# EAGLE board ENC_MPX_V0.1 (EAGLE 9.5.2)
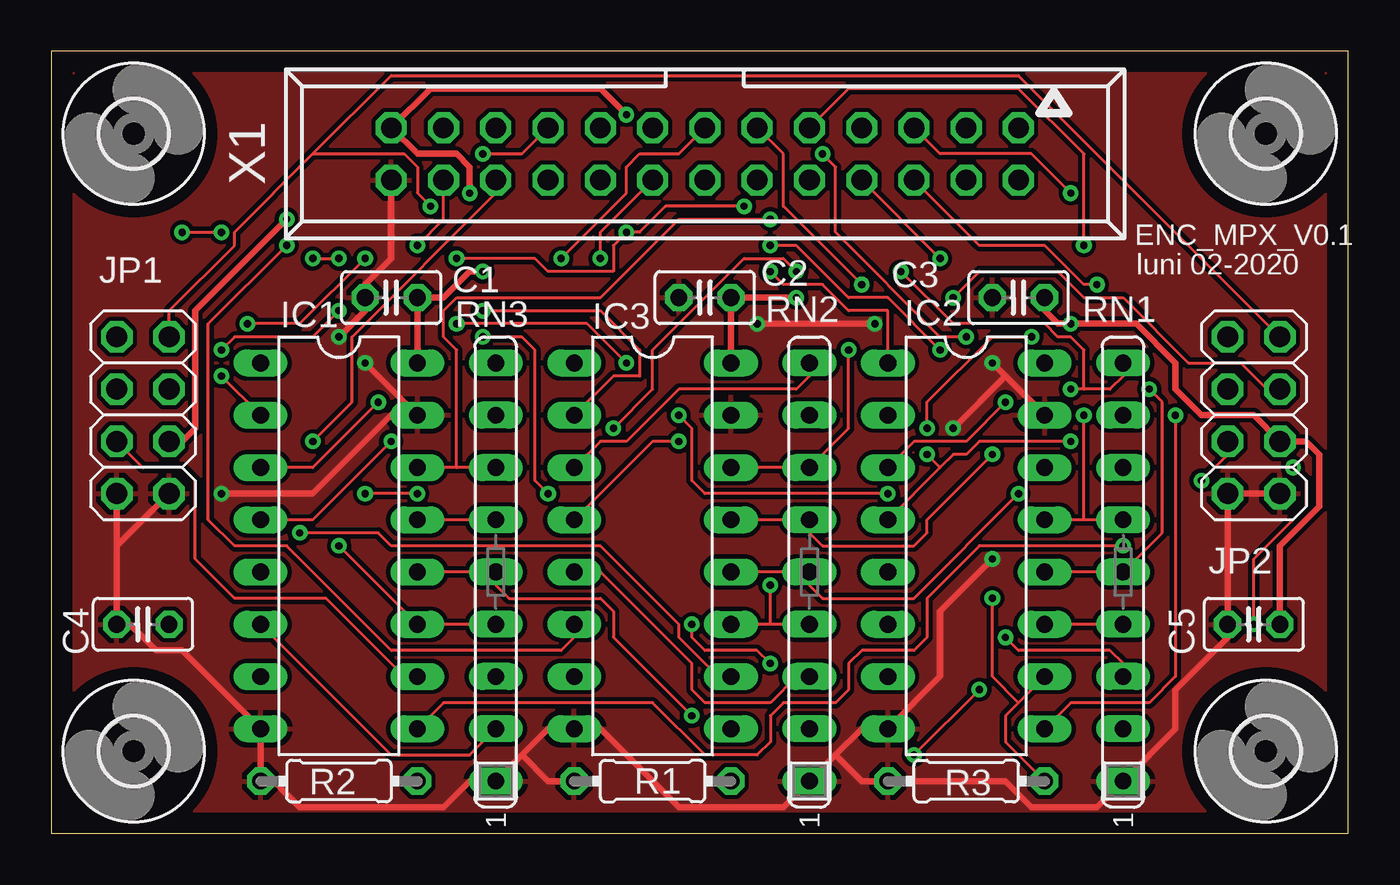
[diagram p0: board, top side]
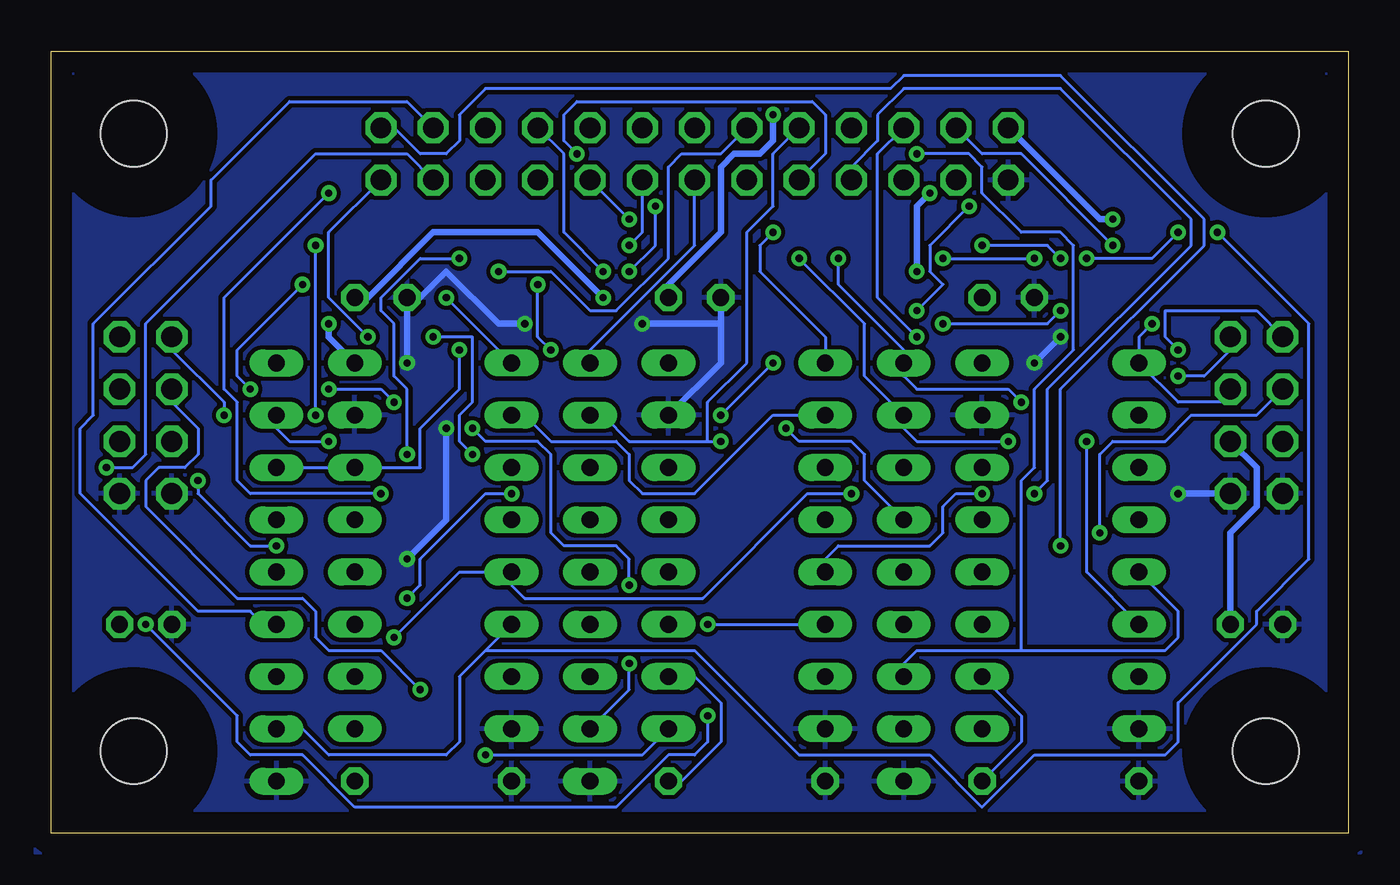
[diagram p1: board, bottom side, seen from below]

Size 63 x 38 mm. Coordinates in mm from the lower left corner, seen from the top.
Outline: 0,0 63,0 63,38 0,38 0,0
Copper layers (1*16): Top 0.035mm / dielectric 1.5mm / Bottom 0.035mm
Design rules "default *": minimum track width 6mil, minimum drill 0.35mm, track to track 8mil, track to pad 6mil, pad to pad 6mil, via to via 6mil, smd to smd 6mil, copper to edge 40mil, drill to drill 6mil, minimum pad ring 10mil, minimum via ring 8mil, stop-mask expansion 4mil, vias tented up to drill 0mil, thermal gap 10mil
Net classes: 1 supply: width 0.305 mm

## Footprints (pad centres in the part's own frame; a part is rotated, then mirrored left to right if it is on the bottom)
C025-025X050 = drill 0.813 octagon: 1 -1.27,0; 2 1.27,0
DIL16 = drill 0.813 long: 1 -8.89,-3.81; 2 -6.35,-3.81; 3 -3.81,-3.81; 4 -1.27,-3.81; 5 1.27,-3.81; 6 3.81,-3.81; 7 6.35,-3.81; 8 8.89,-3.81; 9 8.89,3.81; 10 6.35,3.81; 11 3.81,3.81; 12 1.27,3.81; 13 -1.27,3.81; 14 -3.81,3.81; 15 -6.35,3.81; 16 -8.89,3.81
2X04 = drill 1.016 octagon: 1 -3.81,-1.27; 2 -3.81,1.27; 3 -1.27,-1.27; 4 -1.27,1.27; 5 1.27,-1.27; 6 1.27,1.27; 7 3.81,-1.27; 8 3.81,1.27
0204/7 = drill 0.813 octagon: 1 -3.81,0; 2 3.81,0
SIL9 = drill 0.813 long: 1 -10.16,0; 2 -7.62,0; 3 -5.08,0; 4 -2.54,0; 5 0,0; 6 2.54,0; 7 5.08,0; 8 7.62,0; 9 10.16,0
3,2 = hole 3.2: 0,0
057-026-1 = drill 1 octagon: 1 -15.24,-1.27; 2 -15.24,1.27; 3 -12.7,-1.27; 4 -12.7,1.27; 5 -10.16,-1.27; 6 -10.16,1.27; 7 -7.62,-1.27; 8 -7.62,1.27; 9 -5.08,-1.27; 10 -5.08,1.27; 11 -2.54,-1.27; 12 -2.54,1.27; 13 0,-1.27; 14 0,1.27; 15 2.54,-1.27; 16 2.54,1.27; 17 5.08,-1.27; 18 5.08,1.27; 19 7.62,-1.27; 20 7.62,1.27; 21 10.16,-1.27; 22 10.16,1.27; 23 12.7,-1.27; 24 12.7,1.27; 25 15.24,-1.27; 26 15.24,1.27

## Placement (x,y rotation side)
C1  100n  [C025-025X050]  16.51,26.04 180 top
C2  100n  [C025-025X050]  31.75,26.04 180 top
C3  100n  [C025-025X050]  46.99,26.04 180 top
C4  100n  [C025-025X050]  4.45,10.16 180 top
C5  100n  [C025-025X050]  58.42,10.16 180 top
IC1  74HC165N  [DIL16]  13.97,13.97 270 top
IC2  74HC165N  [DIL16]  44.45,13.97 270 top
IC3  74HC165N  [DIL16]  29.21,13.97 270 top
JP1  [2X04]  4.45,20.32 270 top
JP2  [2X04]  58.42,20.32 270 top
R1  4k7  [0204/7]  29.21,2.54 0 top
R2  4k7  [0204/7]  13.97,2.54 180 top
R3  4k7  [0204/7]  44.45,2.54 0 top
RN1  4k7  [SIL9]  52.07,12.7 90 top
RN2  4k7  [SIL9]  36.83,12.7 90 top
RN3  4k7  [SIL9]  21.59,12.7 90 top
U$1  [3,2]  4,34 0 top
U$2  [3,2]  59,34 0 top
U$3  [3,2]  4,4 0 top
U$4  [3,2]  59,4 0 top
X1  057-026-1  [057-026-1]  31.75,33.02 180 top

## Library data of the parts
C1-C5 = rcl; SPICEPREFIX: C
IC1-IC3 = 74xx-eu
JP1 JP2 = pinhead
R1-R3 = rcl; SPICEPREFIX: R
RN1-RN3 = resistor-sil; OC_FARNELL: unknown; OC_NEWARK: unknown
U$1-U$4 = holes
X1 = con-panduit; OC_FARNELL: unknown; OC_NEWARK: unknown

## Nets
!LD: IC1.1 IC2.1 IC3.1 JP1.4 JP2.4
A1: IC1.11 RN3.4 X1.1
A2: IC1.12 RN3.5 X1.4
A3: IC1.13 RN3.6 X1.7
A4: IC1.14 RN3.7 X1.10
A5: IC1.3 RN3.9 X1.13
A6: IC1.4 RN3.8 X1.16
A7: IC1.5 RN3.3 X1.19
A8: IC1.6 RN3.2 X1.22
B1: IC3.11 RN2.4 X1.2
B2: IC3.12 RN2.5 X1.5
B3: IC3.13 RN2.6 X1.8
B4: IC3.14 RN2.7 X1.11
B5: IC3.3 RN2.9 X1.14
B6: IC3.4 RN2.8 X1.17
B7: IC3.5 RN2.3 X1.20
B8: IC3.6 RN2.2 X1.23
CLK: IC1.2 IC2.2 IC3.2 JP1.2 JP2.2
GND [supply]: C1.2 C2.2 C3.2 C4.2 C5.2 IC1.8 IC1.15 IC2.8 IC2.15 IC3.8 IC3.15 JP1.7 JP1.8 JP2.7 JP2.8 R1.1 R2.2 R3.1 RN1.1 RN2.1 RN3.1 X1.26
QA: IC1.9 JP2.5
QB: IC3.9 JP2.3
QS: IC2.9 JP2.1
S1: IC2.11 RN1.4 X1.3
S2: IC2.12 RN1.5 X1.6
S3: IC2.13 RN1.6 X1.9
S4: IC2.14 RN1.7 X1.12
S5: IC2.3 RN1.9 X1.15
S6: IC2.4 RN1.8 X1.18
S7: IC2.5 RN1.3 X1.21
S8: IC2.6 RN1.2 X1.24
SER_A: IC1.10 JP1.5 R2.1
SER_B: IC3.10 JP1.3 R1.2
SER_S: IC2.10 JP1.1 R3.2
VCC [supply]: C1.1 C2.1 C3.1 C4.1 C5.1 IC1.16 IC2.16 IC3.16 JP1.6 JP2.6 X1.25

## Tracks (layer width: path | path; a pad name or v marks a point on that pad's centre or on a via)
!LD  (via drill 0.35)
  Top 0.152: v33.66,30.48 29.84,30.48 28.57,29.21 v27.94,29.21 27.3,28.57 27.3,27.3 24.13,27.3 23.5,27.94 v19.68,27.94 | v34.92,27.3 35.56,26.67 37.47,26.67 38.73,25.4 40.64,25.4 IC2.1 | JP2.4 59.05,21.59 57.78,22.86 55.24,22.86 52.07,26.04 50.16,26.04 48.9,27.3 45.09,27.3 v43.81,26.04 | v9.53,24.77 12.06,24.77 v15.24,27.94
  Bottom 0.152: JP1.4 5.71,20.95 8.26,20.95 IC1.1 10.16,24.13 v9.53,24.77 | IC3.1 25.4,24.13 28.57,27.3 28.57,28.57 v27.94,29.21 | v33.66,30.48 33.66,28.57 v34.92,27.3 | IC2.1 v43.81,26.04 | v19.68,27.94 v15.24,27.94
A1  (via drill 0.35)
  Top 0.152: RN3.4 IC1.11 v13.97,13.97
  Bottom 0.152: X1.1 46.35,34.29 45.09,33.02 43.81,33.02 43.18,33.66 43.18,34.92 41.91,36.2 22.23,36.2 21.59,36.83 13.97,36.83 6.99,29.84 6.99,28.57 13.97,21.59 v13.97,13.97
A2  (via drill 0.35)
  Top 0.152: 20.95,12.7 IC1.12 | v60.33,17.78 60.96,17.14 60.96,15.88 58.42,13.34 v58.42,10.16 | v31.11,5.71 27.3,9.53 27.3,10.79 26.67,11.43 22.23,11.43 20.95,12.7 | 20.95,12.7 RN3.5
  Bottom 0.152: X1.4 45.72,33.02 50.16,33.02 58.42,24.77 58.42,18.41 59.05,17.78 v60.33,17.78 | v58.42,10.16 53.98,5.71 53.98,4.45 53.34,3.81 50.8,3.81 48.26,1.27 35.56,1.27 33.02,3.81 31.75,3.81 31.11,4.45 v31.11,5.71
A3  (via drill 0.35)
  Top 0.152: RN3.6 IC1.13 | v36.2,27.3 35.56,27.94 33.66,27.94 29.21,23.5 29.21,21.59 v27.3,19.68
  Bottom 0.152: X1.7 38.1,33.02 38.1,29.21 v36.2,27.3 | v27.3,19.68 26.67,19.05 24.13,19.05 23.5,18.41 23.5,17.14 RN3.6
A4  (via drill 0.35)
  Top 0.152: RN3.7 19.68,17.78 | 19.68,17.78 IC1.14 | v34.92,29.84 30.48,29.84 26.67,26.04 19.68,26.04 19.05,25.4 19.05,24.13 19.68,23.5 19.68,17.78
  Bottom 0.152: v34.92,29.84 X1.10
A5  (via drill 0.35)
  Top 0.152: IC1.3 12.7,17.78 v15.88,20.95 | X1.13 30.48,33.02 28.57,33.02 27.94,32.38 27.94,31.11 v24.77,27.94
  Bottom 0.152: v15.88,20.95 16.51,21.59 20.95,21.59 21.59,22.23 | v24.77,27.94 24.77,26.67 20.95,22.86 21.59,22.23 | 21.59,22.23 RN3.9
A6  (via drill 0.35)
  Top 0.152: IC1.4 12.7,15.24 v16.51,19.05 | X1.16 26.67,29.21 v26.67,27.94
  Bottom 0.152: v16.51,19.05 20.95,19.05 21.59,19.68 | v26.67,27.94 23.5,24.77 23.5,22.23 22.23,20.95 22.23,20.32 21.59,19.68 | 21.59,19.68 RN3.8
A7  (via drill 0.35)
  Top 0.152: X1.19 22.86,33.02 v20.95,33.02
  Bottom 0.152: IC1.5 8.26,10.79 8.26,9.53 8.89,8.89 15.88,8.89 | 15.88,8.89 20.95,8.89 21.59,8.26 RN3.3 | v20.95,33.02 18.41,33.02 17.78,32.38 17.78,31.11 15.88,29.21 13.97,29.21 13.34,28.57 13.34,23.5 15.24,21.59 15.24,17.78 15.88,17.14 15.88,8.89
A8  (via drill 0.35)
  Top 0.152: RN3.2 20.32,3.81 16.51,3.81 IC1.6 | X1.22 21.59,31.11 14.61,24.13 14.61,20.95 v12.7,19.05
  Bottom 0.152: v12.7,19.05 12.7,12.7 IC1.6
B1  (via drill 0.35)
  Top 0.152: RN2.4 34.92,10.16 | 34.92,10.16 IC3.11 | v47.62,24.13 45.72,24.13 42.55,20.95 v42.55,19.68 | 34.92,10.16 v34.92,12.06
  Bottom 0.152: X1.2 49.53,29.21 49.53,26.04 v47.62,24.13 | v42.55,19.68 41.91,19.05 39.37,19.05 38.73,18.41 38.73,14.61 38.1,13.97 35.56,13.97 34.92,13.34 v34.92,12.06
B2  (via drill 0.35)
  Top 0.152: 36.2,12.7 IC3.12 | X1.5 43.18,33.02 47.62,33.02 v49.53,31.11 | v46.99,16.51 41.91,11.43 37.47,11.43 36.2,12.7 | 36.2,12.7 RN2.5
  Bottom 0.152: v49.53,31.11 54.61,26.04 54.61,21.59 53.98,20.95 53.98,17.14 53.34,16.51 v46.99,16.51
B3  (via drill 0.35)
  Top 0.152: 36.2,15.24 IC3.13 | v43.18,27.94 X1.8 | v45.72,18.41 42.55,15.24 42.55,14.61 41.91,13.97 37.47,13.97 36.2,15.24 | 36.2,15.24 RN2.6
  Bottom 0.152: v43.18,27.94 45.09,27.94 46.99,26.04 46.99,25.4 46.35,24.77 46.35,22.23 45.72,21.59 v45.72,18.41
B4  (via drill 0.35)
  Top 0.152: IC3.14 RN2.7 38.73,19.68 v38.73,23.5 | X1.11 35.56,33.02 35.56,30.48 v39.37,26.67
  Bottom 0.152: v39.37,26.67 39.37,24.13 v38.73,23.5
B5
  Top 0.152: IC3.3 26.67,19.05 27.94,19.05 30.48,21.59 36.2,21.59 36.83,22.23 RN2.9
  Bottom 0.152: X1.14 31.75,28.57 36.83,23.5 RN2.9
B6  (via drill 0.35)
  Top 0.152: IC3.4 29.21,19.05 v30.48,19.05
  Bottom 0.152: 31.11,19.05 34.92,19.05 36.2,20.32 RN2.8 | 31.11,19.05 v30.48,19.05 | X1.17 27.94,33.02 27.94,30.48 29.21,29.21 29.21,22.86 31.11,20.95 31.11,19.05
B7  (via drill 0.35)
  Top 0.152: IC3.5 26.67,12.7 31.11,8.26 31.11,6.99 31.75,6.35 34.92,6.35 36.2,7.62 RN2.3 | v17.78,16.51 v15.24,16.51
  Bottom 0.152: X1.20 24.13,32.38 22.86,33.66 22.86,34.92 21.59,36.2 13.97,36.2 7.62,29.84 7.62,28.57 14.61,21.59 14.61,17.14 v15.24,16.51 | v17.78,16.51 19.05,16.51 19.68,15.88 19.68,14.61 20.32,13.97 24.77,13.97 25.4,13.34 IC3.5
B8  (via drill 0.35)
  Top 0.152: v31.11,10.16 31.11,9.53 31.75,8.89 34.29,8.89 v34.92,8.26 | v11.43,28.57 7.62,24.77 7.62,15.24 8.89,13.97 11.43,13.97 16.51,8.89 24.77,8.89 25.4,9.53 IC3.6
  Bottom 0.152: v31.11,10.16 IC3.6 | v34.92,8.26 34.92,6.99 RN2.2 | X1.23 17.78,33.02 15.88,33.02 v11.43,28.57
CLK  (via drill 0.35)
  Top 0.152: v8.26,22.23 IC1.2 | JP2.2 46.99,36.83 16.51,36.83 12.7,33.02 | 12.7,33.02 8.89,29.21 8.89,28.57 5.71,25.4 JP1.2 | IC3.2 27.3,22.23 28.57,22.23 28.57,23.5 26.67,25.4 v20.95,25.4 | v18.41,30.48 17.78,31.11 17.78,32.38 17.14,33.02 12.7,33.02
  Bottom 0.152: IC3.2 27.94,20.32 31.75,16.51 34.29,16.51 34.92,17.14 34.92,18.41 35.56,19.05 38.73,19.05 40.01,20.32 IC2.2 | v8.26,22.23 6.99,22.23 5.71,23.5 JP1.2 | v20.95,25.4 19.68,26.67 20.32,27.3 20.32,28.57 v18.41,30.48
GND  (via drill 0.35)
  Top 0.305: X1.26 16.51,27.94 15.24,26.67 C1.2 15.24,25.4 v13.97,24.13 | v15.24,22.86 17.14,20.95 | 22.86,3.81 24.13,5.08 IC3.8 26.67,5.08 30.48,1.27 35.56,1.27 RN2.1 38.1,3.81 | 22.86,3.81 RN3.1 20.32,2.54 19.05,1.27 12.06,1.27 10.16,3.17 | R1.1 24.13,2.54 22.86,3.81 | 10.16,3.17 IC1.8 6.35,8.89 5.08,8.89 3.17,10.79 | JP1.7 3.17,13.97 | 3.17,13.97 3.17,10.79 | 3.17,13.97 JP1.8 | 3.17,10.79 C4.2 | 10.16,3.17 R2.2 | 17.14,20.95 12.7,16.51 v8.26,16.51 | 17.14,20.95 IC1.15 | IC2.15 46.35,22.23 | 46.35,22.23 v45.72,22.86 | v40.01,24.77 v34.29,24.77 | 38.1,3.81 39.37,5.08 IC2.8 43.18,7.62 43.18,10.79 v45.72,13.34 | 38.1,3.81 39.37,2.54 R3.1 46.35,2.54 47.62,1.27 50.8,1.27 RN1.1 54.61,5.08 54.61,6.99 57.15,9.53 C5.2 JP2.7 JP2.8 | v43.81,19.68 46.35,22.23
  Bottom 0.305: v13.97,24.13 v15.24,22.86 | JP1.8 v8.26,16.51 | 30.48,24.77 30.48,22.86 IC3.15 | 30.48,24.77 C2.2 | v45.72,22.86 45.72,25.4 | v34.29,24.77 30.48,24.77 | v40.01,24.77 41.27,24.77 43.81,27.3 45.72,25.4 | 45.72,25.4 C3.2 | v43.81,19.68 43.81,15.24 v45.72,13.34
  pour Top: -0.64,38.73 63.18,38.73 63.18,-0.32 -0.64,-0.32
  pour Bottom: -0.64,38.73 63.82,38.73 63.82,-0.95 -0.64,-0.95
QA  (via drill 0.35)
  Top 0.152: IC1.9 19.05,6.35 29.21,6.35 31.75,3.81 34.29,3.81 34.92,4.45 34.92,5.71 35.56,6.35 38.1,6.35 38.73,6.99 38.73,8.26 39.37,8.89 41.91,8.89 42.55,9.53 42.55,11.43 45.09,13.97 v52.07,13.97 | v55.88,17.14 57.15,18.41 JP2.5
  Bottom 0.152: v52.07,13.97 53.34,13.97 55.88,16.51 v55.88,17.14
QB  (via drill 0.35)
  Top 0.152: v45.09,6.99 v41.91,3.81
  Bottom 0.152: IC3.9 34.29,3.81 v41.91,3.81 | v45.09,6.99 46.99,8.89 49.53,8.89 50.16,9.53 50.16,10.79 50.8,11.43 53.98,11.43 58.42,15.88 58.42,17.14 57.78,17.78 56.52,17.78 55.88,18.41 55.88,19.68 57.15,20.95 JP2.3
QS  (via drill 0.35)
  Top 0.152: IC2.9 49.53,6.35 53.34,6.35 54.61,7.62 v54.61,20.32
  Bottom 0.152: v54.61,20.32 54.61,20.95 57.15,23.5 JP2.1
S1
  Top 0.152: RN1.4 IC2.11
  Bottom 0.152: X1.3 45.72,35.56 51.44,35.56 55.24,31.75 55.24,30.48 60.96,24.77 60.96,20.32 61.59,19.68 61.59,16.51 55.88,10.79 53.34,10.79 52.7,10.16 RN1.4
S2  (via drill 0.35)
  Top 0.152: IC2.12 RN1.5 53.98,14.61 53.98,20.95 v53.34,21.59 | X1.6 45.09,28.57 48.26,28.57 50.16,26.67 v50.8,26.67
  Bottom 0.152: v50.8,26.67 53.98,23.5 53.98,22.23 v53.34,21.59
S3  (via drill 0.35)
  Top 0.152: RN1.6 50.16,15.24 | 50.16,15.24 IC2.13 | X1.9 38.73,36.2 46.99,36.2 50.16,33.02 v50.16,28.57 | 50.16,15.24 v50.16,20.32
  Bottom 0.152: v50.16,20.32 v50.16,28.57
S4  (via drill 0.35)
  Top 0.152: v34.92,28.57 36.2,28.57 38.73,26.04 40.64,26.04 v43.18,23.5
  Bottom 0.152: RN1.7 IC2.14 45.09,17.78 45.09,19.68 43.18,21.59 v43.18,23.5 | X1.12 34.29,29.21 v34.92,28.57
S5  (via drill 0.35)
  Top 0.152: IC2.3 41.91,19.05 44.45,19.05 v46.35,20.95 | 50.16,21.59 51.44,21.59 52.07,22.23 RN1.9 | 50.16,21.59 v49.53,21.59 | v41.27,27.3 43.81,24.77 48.26,24.77 48.9,24.13 49.53,24.13 50.16,23.5 50.16,21.59
  Bottom 0.152: v46.35,20.95 46.99,21.59 v49.53,21.59 | X1.15 30.48,33.02 32.38,33.02 33.02,32.38 33.02,27.94 35.56,25.4 36.83,25.4 38.73,27.3 v41.27,27.3
S6  (via drill 0.35)
  Top 0.152: 43.18,17.78 43.81,18.41 44.45,18.41 45.09,19.05 v49.53,19.05 | 43.18,17.78 IC2.4 | v37.47,33.02 38.1,32.38 38.1,29.21 43.18,24.13 v44.45,24.13 | 43.18,17.78 v42.55,18.41
  Bottom 0.152: v49.53,19.05 51.44,19.05 52.07,19.68 RN1.8 | X1.18 25.4,33.02 25.4,34.92 26.04,35.56 37.47,35.56 38.1,34.92 38.1,33.66 v37.47,33.02 | v44.45,24.13 42.55,24.13 42.55,20.95 43.18,20.32 43.18,19.05 v42.55,18.41
S7  (via drill 0.35)
  Top 0.152: v46.35,9.53 46.99,8.89 51.44,8.89 52.07,8.26 RN1.3 | v20.95,24.13 22.86,24.13 23.5,23.5 23.5,17.14 v24.13,16.51
  Bottom 0.152: 41.27,12.7 43.18,12.7 v46.35,9.53 | X1.21 22.86,33.02 22.86,26.04 v20.95,24.13 | v24.13,16.51 26.27,16.51 31.35,11.43 40.01,11.43 41.27,12.7 | 41.27,12.7 IC2.5
S8  (via drill 0.35)
  Top 0.152: X1.24 19.05,29.84 v17.78,28.57 | v12.7,27.94 v13.97,27.94 | v6.35,29.21 v8.26,29.21
  Bottom 0.152: RN1.2 50.8,5.08 49.53,3.81 43.81,3.81 43.18,4.45 43.18,7.62 41.91,8.89 | IC2.6 41.91,8.89 | v17.78,28.57 14.61,28.57 v13.97,27.94 | v12.7,27.94 9.53,27.94 v8.26,29.21 | v6.35,29.21 1.91,24.77 1.91,13.34 4.45,10.79 4.45,10.16 8.26,6.35 8.26,4.45 8.89,3.81 15.24,3.81 17.78,1.27 20.32,3.81 26.67,3.81 31.75,8.89 41.91,8.89
SER_A
  Top 0.152: JP1.5 4.45,17.78 6.35,17.78 6.99,17.14 6.99,13.34 8.89,11.43 13.34,11.43 17.14,7.62 IC1.10
  Bottom 0.152: R2.1 15.88,4.45 15.88,5.71 IC1.10
SER_B  (via drill 0.35)
  Top 0.152: v12.06,14.61 15.88,14.61 16.51,13.97 26.67,13.97 30.48,10.16 30.48,9.53 32.38,7.62 IC3.10
  Bottom 0.152: R1.2 32.38,2.54 30.48,4.45 30.48,6.35 31.75,7.62 IC3.10 | JP1.3 4.45,20.32 7.62,20.32 8.89,19.05 11.43,19.05 12.06,18.41 v12.06,14.61
SER_S  (via drill 0.35)
  Top 0.152: R3.2 46.35,4.45 46.35,5.71 46.99,6.35 | IC2.10 46.99,6.35 | v8.26,23.5 8.89,24.13 12.7,24.13 v13.97,25.4 | v19.68,24.77 26.04,24.77 v27.94,22.86 | v30.48,20.32 31.11,19.68 31.11,17.14 31.75,16.51 v40.64,16.51 | v45.72,11.43 45.72,7.62 46.99,6.35
  Bottom 0.152: JP1.1 4.45,25.4 8.89,25.4 8.89,24.13 v8.26,23.5 | v13.97,25.4 14.61,24.77 v19.68,24.77 | v30.48,20.32 v27.94,22.86 | v40.64,16.51 41.91,16.51 45.09,13.34 45.09,12.06 v45.72,11.43
VCC  (via drill 0.35)
  Top 0.305: IC1.16 C1.1 19.05,26.04 20.32,27.3 v20.95,27.3 | v11.43,29.84 6.99,25.4 6.99,19.68 6.35,19.05 JP1.6 | v20.32,31.11 20.32,32.38 19.68,33.02 17.78,33.02 X1.25 18.41,36.2 26.67,36.2 v27.94,34.92 | C5.1 59.69,13.97 61.59,15.88 61.59,18.41 60.96,19.05 JP2.6 58.42,20.32 55.88,20.32 54.61,21.59 54.61,22.86 52.7,24.77 v49.53,24.77 48.9,24.77 48.26,25.4 C3.1 | IC3.16 C2.1 v36.2,26.04
  Bottom 0.305: C4.1 5.71,14.61 4.45,15.88 4.45,17.78 JP1.6 | X1.25 12.06,29.84 v11.43,29.84 | v20.95,27.3 20.95,30.48 v20.32,31.11 | IC2.16 49.53,24.13 v49.53,24.77 | v36.2,26.04 39.37,29.21 44.45,29.21 47.62,26.04 C3.1 | v27.94,34.92 27.94,33.66 28.57,33.02 29.84,33.02 30.48,32.38 30.48,29.21 33.02,26.67 C2.1

## Text on the board
tNames: ENC_MPX_V0.1 | luni 02-2020